# EAGLE board teensyMotors02_upSwitch_LED (EAGLE 9.1.3)
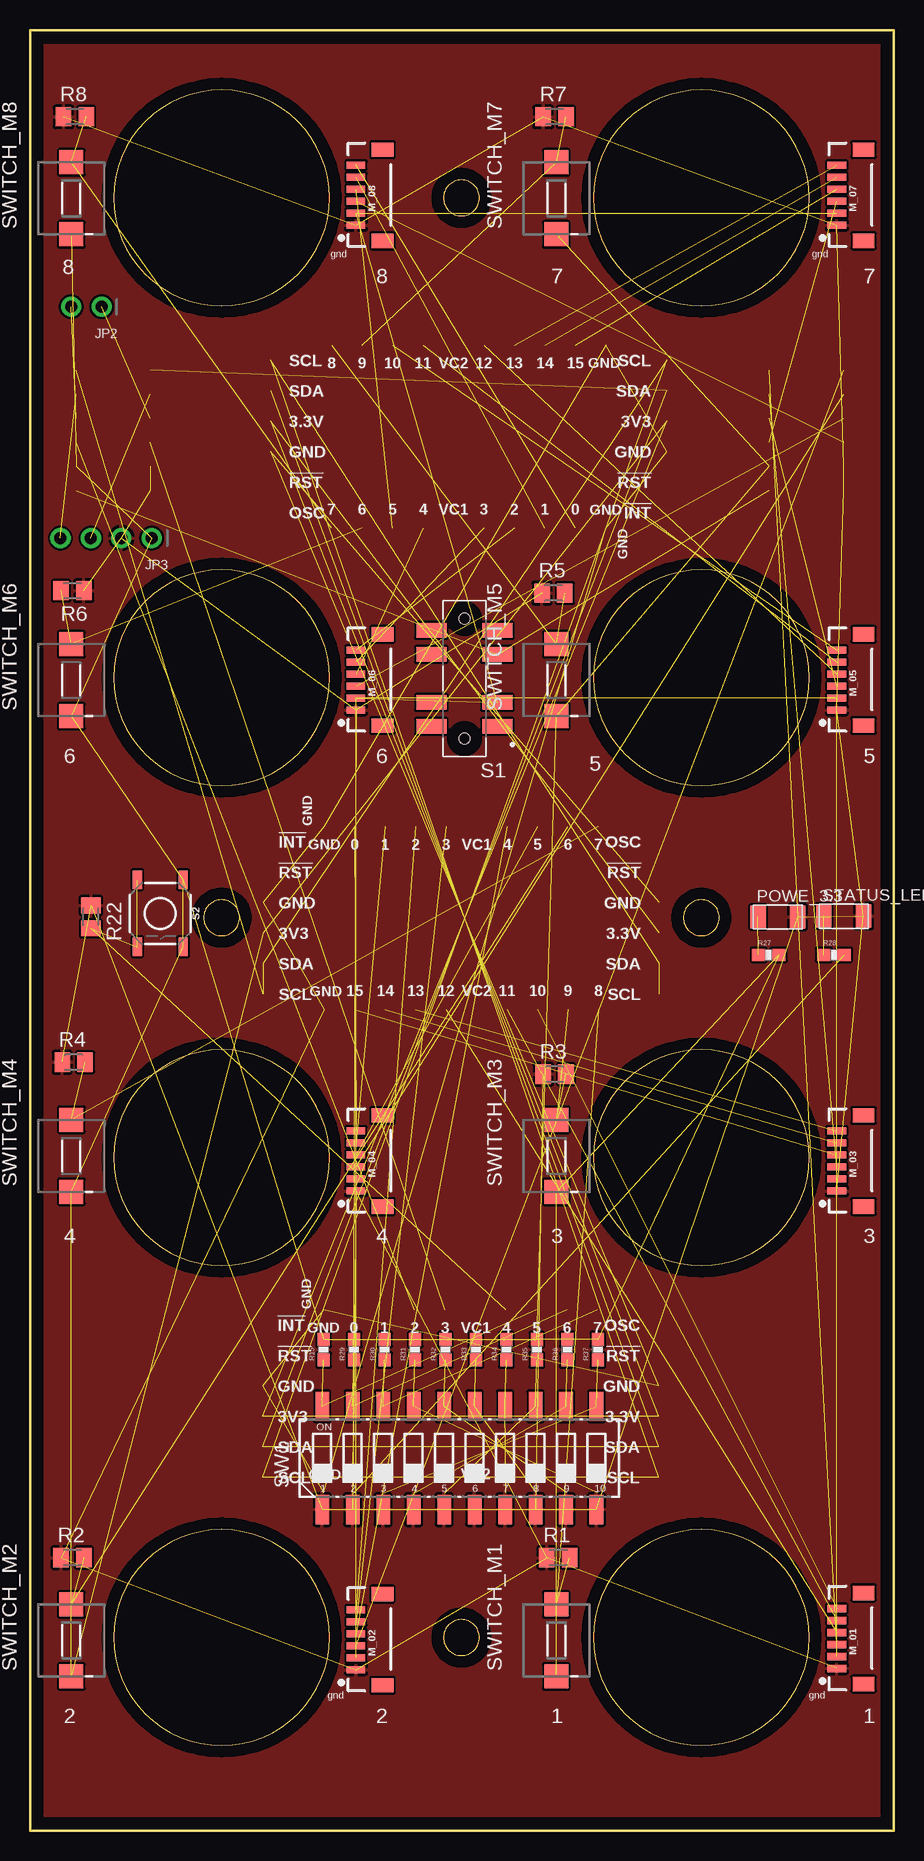
[diagram p0: board, top side]
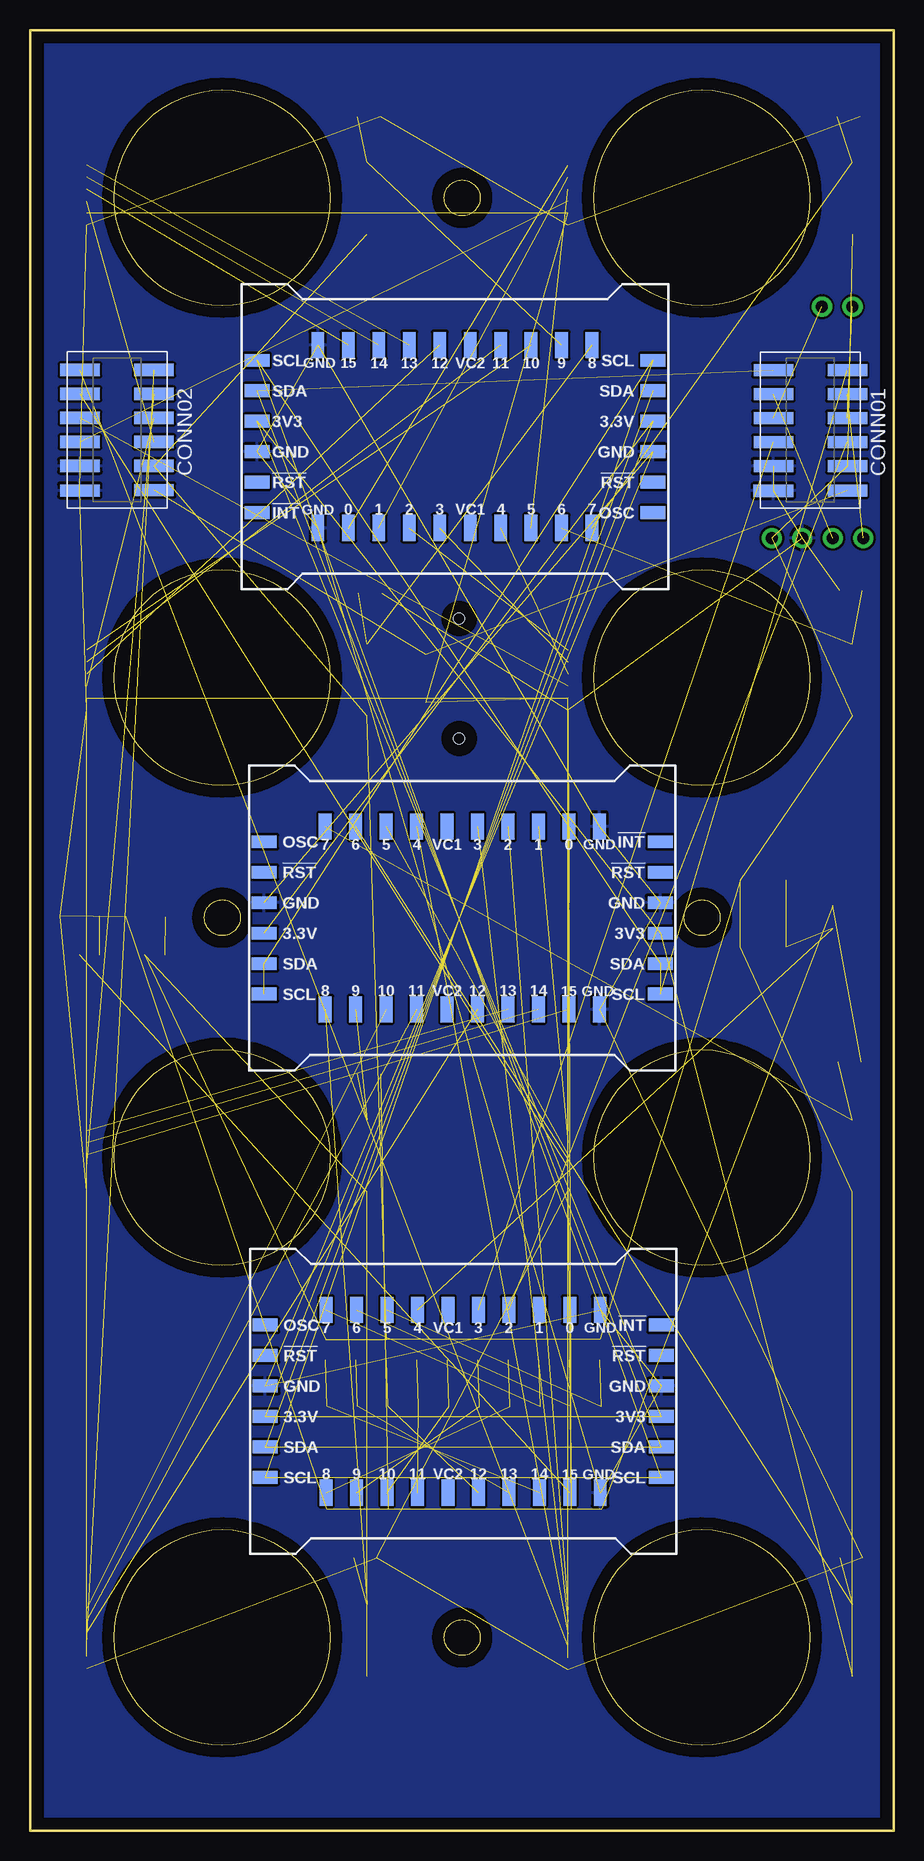
[diagram p1: board, bottom side, seen from below]

Size 72.01 x 150.09 mm. Coordinates in mm from the lower left corner, seen from the top.
Outline: 35.97,14.59 arc180 35.97,17.59 arc180 35.97,14.59
Outline: 15.97,74.59 arc180 15.97,77.59 arc180 15.97,74.59
Outline: 35.97,134.59 arc180 35.97,137.59 arc180 35.97,134.59
Outline: 55.97,74.59 arc180 55.97,77.59 arc180 55.97,74.59
Outline: 15.97,127.09 arc180 15.97,145.09 arc180 15.97,127.09
Outline: 55.97,127.09 arc180 55.97,145.09 arc180 55.97,127.09
Outline: 55.97,87.09 arc180 55.97,105.09 arc180 55.97,87.09
Outline: 55.97,47.09 arc180 55.97,65.09 arc180 55.97,47.09
Outline: 55.97,7.09 arc180 55.97,25.09 arc180 55.97,7.09
Outline: 15.97,7.09 arc180 15.97,25.09 arc180 15.97,7.09
Outline: 15.97,47.09 arc180 15.97,65.09 arc180 15.97,47.09
Outline: 15.97,87.09 arc180 15.97,105.09 arc180 15.97,87.09
Outline: 72.01,150.09 72.01,0 0,0 0,150.09 72.01,150.09
Copper layers (1*16): Top 0.035mm / dielectric 1.5mm / Bottom 0.035mm
Design rules "default": minimum track width 6mil, minimum drill 0.35mm, track to track 6mil, track to pad 6mil, pad to pad 6mil, via to via 6mil, smd to smd 6mil, copper to edge 40mil, drill to drill 6mil, minimum pad ring 10mil, minimum via ring 8mil, stop-mask expansion 4mil, vias tented up to drill 0mil, thermal gap 10mil
Net classes: 0 default: width 0.2 mm, clearance 0.2 mm; 1 gnd: width 0.2 mm, clearance 0.2 mm; 4 5v: width 0.35 mm, clearance 0.2 mm

## Footprints (pad centres in the part's own frame; a part is rotated, then mirrored left to right if it is on the bottom)
TMMH-105-12 = smd 1.016 x 3.302: 1 -5.27,-3.086; 2 -5.27,3.086; 3 -3.27,-3.086; 4 -3.27,3.086; 5 -1.27,-3.086; 6 -1.27,3.086; 7 0.73,-3.086; 8 0.73,3.086; 9 2.73,-3.086; 10 2.73,3.086; 11 4.781,-3.099; 12 4.755,3.086
1X02_ROUND = drill 1 pad 1.676: 1 -1.27,0; 2 1.27,0
1X04_ROUND = drill 1 pad 1.676: 1 -3.81,0; 2 -1.27,0; 3 1.27,0; 4 3.81,0
1X06-1MM = smd 0.6 x 1.55: 1 -2.54,1.27; 2 -1.54,1.27; 3 -0.54,1.27; 4 0.46,1.27; 5 1.46,1.27; 6 2.46,1.27 | smd 1.2 x 1.8: P$1 -3.84,-0.955; P$2 3.76,-0.955
LED1206FAB = smd 1.27 x 1.905: 1 -1.651,0; 2 1.651,0
M0805 = smd 1.3 x 1.6: 1 -0.95,0; 2 0.95,0
0603-RES = smd 1.1 x 1: 1 -0.85,0; 2 0.85,0
SW_JS207011SCQNR = smd 2.5 x 1.2: 1 -2.75,4; 2 -2.75,2; 3 -2.75,-2; 4 -2.75,-4; 5 2.75,4; 6 2.75,2; 7 2.75,-2; 8 2.75,-4 | hole 0.9: 0,5; 0,-5
TACTILE_SWITCH_SMD_5.2MM = smd 1.524 x 0.762: 1 -2.794,1.905; 2 2.794,1.905; 3 -2.794,-1.905; 4 2.794,-1.905
CTS-219-10 = smd 1.13 x 2.44: 1 -11.43,-4.3; 2 -8.89,-4.3; 3 -6.35,-4.3; 4 -3.81,-4.3; 5 -1.27,-4.3; 6 1.27,-4.3; 7 3.81,-4.3; 8 6.35,-4.3; 9 8.89,-4.3; 10 11.43,-4.3; 11 11.43,4.3; 12 8.89,4.3; 13 6.35,4.3; 14 3.81,4.3; 15 1.27,4.3; 16 -1.27,4.3; 17 -3.81,4.3; 18 -6.35,4.3; 19 -8.89,4.3; 20 -11.43,4.3
DTSM-3 = smd 2 x 2: 1 -3,0; 2 3,0
SX1509 = smd 2.184 x 1.067: 0 -7.62,7.62; 1 -7.62,5.08; 2 -7.62,2.54; 3 -7.62,0; 4 -7.62,-5.08; 5 -7.62,-7.62; 6 -7.62,-10.16; 7 -7.62,-12.7; 8 7.62,-12.7; 9 7.62,-10.16; 10 7.62,-7.62; 11 7.62,-5.08; 12 7.62,0; 13 7.62,2.54; 14 7.62,5.08; 15 7.62,7.62; GND_1 7.62,10.16; GND_2 -7.62,10.16; VC2 7.62,-2.54; VCC1 -7.62,-2.54 | smd 1.067 x 2.083: 3.3V 1.27,-17.78; 3.3V_1 1.27,15.24; GND -1.27,-17.78; GND_3 -1.27,15.24; INT -6.35,15.24; OSC -6.35,-17.78; RST -3.81,-17.78; RST_1 -3.81,15.24; SCL 6.35,-17.78; SCL_2 6.35,15.24; SDA 3.81,-17.78; SDA_2 3.81,15.24

## Placement (x,y rotation side)
CONN01  TMMH-105-12  [TMMH-105-12]  6.93,116.46 270 bottom
CONN02  TMMH-105-12  [TMMH-105-12]  64.75,116.48 270 bottom
JP2  [1X02_ROUND]  4.7,127.03 180 top
JP3  [1X04_ROUND]  6.35,107.75 180 top
M_01  [1X06-1MM]  68.54,16.05 90 top
M_02  [1X06-1MM]  28.44,15.95 90 top
M_03  [1X06-1MM]  68.54,55.85 90 top
M_04  [1X06-1MM]  28.44,55.85 90 top
M_05  [1X06-1MM]  68.54,95.95 90 top
M_06  [1X06-1MM]  28.44,95.95 90 top
M_07  [1X06-1MM]  68.54,136.35 90 top
M_08  [1X06-1MM]  28.44,136.35 90 top
POWE_3.3  LEDFAB1206  [LED1206FAB]  62.36,76.15 0 top
R1  10k  [M0805]  44.04,22.75 0 top
R2  10k  [M0805]  3.54,22.75 0 top
R3  10k  [M0805]  43.74,63.05 0 top
R4  10K  [M0805]  3.64,64.05 0 top
R5  10k  [M0805]  43.64,103.15 0 top
R6  10k  [M0805]  3.54,103.35 180 top
R7  10k  [M0805]  43.74,142.85 0 top
R8  10k  [M0805]  3.74,142.85 0 top
R15  10K  [0603-RES]  24.49,40.08 90 top
R22  10K  [M0805]  5.09,76.16 270 top
R27  500  [0603-RES]  61.59,73 0 top
R28  500  [0603-RES]  67.03,73 0 top
R29  10K  [0603-RES]  27.03,40.08 90 top
R30  10K  [0603-RES]  29.57,40.08 90 top
R31  10K  [0603-RES]  32.11,40.08 90 top
R32  10K  [0603-RES]  34.65,40.08 90 top
R33  10K  [0603-RES]  37.19,40.08 90 top
R34  10K  [0603-RES]  39.73,40.08 90 top
R35  10K  [0603-RES]  42.27,40.08 90 top
R36  10K  [0603-RES]  44.81,40.08 90 top
R37  10K  [0603-RES]  47.35,40.08 90 top
S1  JS207011SCQNR  [SW_JS207011SCQNR]  36.22,96.04 180 top
S2  [TACTILE_SWITCH_SMD_5.2MM]  10.86,76.46 270 top
STATUS_LED  LEDFAB1206  [LED1206FAB]  67.84,76.23 0 top
SW1  219-10  [CTS-219-10]  35.8,31.06 0 top
SWITCH_M1  DTSM-3  [DTSM-3]  43.89,15.85 90 top
SWITCH_M2  DTSM-3  [DTSM-3]  3.44,15.85 90 top
SWITCH_M3  DTSM-3  [DTSM-3]  43.89,56.25 90 top
SWITCH_M4  DTSM-3  [DTSM-3]  3.44,56.25 90 top
SWITCH_M5  DTSM-3  [DTSM-3]  43.89,95.9 90 top
SWITCH_M6  DTSM-3  [DTSM-3]  3.44,95.9 90 top
SWITCH_M7  DTSM-3  [DTSM-3]  43.89,136.05 90 top
SWITCH_M8  DTSM-3  [DTSM-3]  3.44,136.05 90 top
U$1  SX1509  [SX1509]  34.7,76.07 270 bottom
U$2  SX1509  [SX1509]  37.85,116.2 90 bottom
U$3  SX1509  [SX1509]  34.62,35.79 270 bottom

## Library data of the parts
CONN01 CONN02 = TMMH-105-XX-XX-DV
JP2 JP3 = microbuilder
M_01-M_08 = SparkFun-Connectors; PROD_ID: CONN-08249; SF_ID: GPS-00579
POWE_3.3 STATUS_LED = fab
R1-R8 R22 = resistor
R15 R27-R37 = SparkFun-Resistors; PROD_ID: RES-00824
S1 = JS207011SCQNR; AVAILABILITY: Unavailable; DESCRIPTION: Slide Switch DP3T Surface Mount; MF: C&K; MP: JS207011SCQNR; PACKAGE: None; PRICE: None
S2 = SparkFun-Switches; PROD_ID: SWCH-08247; SF_SKU: COM-08720
SW1 = switch-dil; MF: SLI (CML/IDI); MPN: 219-10PK; OC_FARNELL: unknown; OC_NEWARK: 19M0224
SWITCH_M1-SWITCH_M8 = switch-tact
U$1-U$3 = SX1509_s

## Nets
0_SX1: M_04.6 U$1.0
0_SX2: M_08.6 U$2.0
0_SX3: U$3.0
1_SX1: M_04.5 U$1.1
1_SX2: M_08.5 U$2.1
1_SX3: U$3.1
2_SX1: M_02.6 U$1.2
2_SX2: M_06.6 U$2.2
2_SX3: CONN01.8 U$3.2
3.3V: CONN01.10 CONN02.10 JP3.1 R15.2 R27.2 R29.2 R30.2 R31.2 R32.2 R33.2 R34.2 R35.2 R36.2 R37.2 S2.1 S2.2 SWITCH_M1.1 SWITCH_M2.1 SWITCH_M3.1 SWITCH_M4.1 SWITCH_M5.1 SWITCH_M6.1 SWITCH_M7.1 SWITCH_M8.1 U$1.3.3V U$1.3.3V_1 U$2.3.3V U$2.3.3V_1 U$3.3.3V U$3.3.3V_1
3_SX1: M_02.5 U$1.3
3_SX2: M_06.5 U$2.3
3_SX3: CONN01.7 U$3.3
4_SX1: M_02.4 U$1.4
4_SX2: M_06.4 U$2.4
4_SX3: R22.2 S2.3 S2.4 U$3.4
5_SX1: M_04.4 U$1.5
5_SX2: M_08.4 U$2.5
5_SX3: R15.1 SW1.20 U$3.5
6_SX1: R2.2 SWITCH_M2.2 U$1.6
6_SX2: R6.2 SWITCH_M6.2 U$2.6
6_SX3: R29.1 SW1.19 U$3.6
7_SX1: R4.2 SWITCH_M4.2 U$1.7
7_SX2: R8.2 SWITCH_M8.2 U$2.7
7_SX3: R30.1 SW1.18 U$3.7
8_SX1: R1.2 SWITCH_M1.2 U$1.8
8_SX2: R5.2 SWITCH_M5.2 U$2.8
8_SX3: R31.1 SW1.17 U$3.8
9_SX1: R3.2 SWITCH_M3.2 U$1.9
9_SX2: R7.2 SWITCH_M7.2 U$2.9
9_SX3: R32.1 SW1.16 U$3.9
10_SX1: M_01.6 U$1.10
10_SX2: M_05.6 U$2.10
10_SX3: R33.1 SW1.15 U$3.10
11_SX1: M_01.5 U$1.11
11_SX2: M_05.5 U$2.11
11_SX3: R34.1 SW1.14 U$3.11
12_SX1: M_01.4 U$1.12
12_SX2: M_05.4 U$2.12
12_SX3: R35.1 SW1.13 U$3.12
13_SX1: M_03.6 U$1.13
13_SX2: M_07.6 U$2.13
13_SX3: R36.1 SW1.12 U$3.13
14_SX1: M_03.5 U$1.14
14_SX2: M_07.5 U$2.14
14_SX3: R37.1 SW1.11 U$3.14
15_SX1: M_03.4 U$1.15
15_SX2: M_07.4 U$2.15
15_SX3: R28.2 U$3.15
CAN_RX2: CONN01.4 JP3.4
CAN_TX2: CONN01.3 JP3.3
GND_MCU: CONN01.9 CONN01.11 CONN02.9 CONN02.11 JP3.2 M_01.1 M_02.1 M_03.1 M_04.1 M_05.1 M_06.1 M_07.1 M_08.1 POWE_3.3.2 R1.1 R2.1 R3.1 R4.1 R5.1 R6.1 R7.1 R8.1 R22.1 STATUS_LED.2 SW1.1 SW1.2 SW1.3 SW1.4 SW1.5 SW1.6 SW1.7 SW1.8 SW1.9 SW1.10 U$1.GND U$1.GND_1 U$1.GND_2 U$1.GND_3 U$2.GND U$2.GND_1 U$2.GND_2 U$2.GND_3 U$3.GND U$3.GND_1 U$3.GND_2 U$3.GND_3
N$4: U$1.INT
N$13: R28.1 STATUS_LED.1
N$25: U$3.INT
N$193: POWE_3.3.1 R27.1
NEOPIXEL_01: CONN02.2 M_01.3
NEOPIXEL_02: CONN02.1 M_02.3
NEOPIXEL_03: CONN02.4 M_03.3
NEOPIXEL_04: CONN02.3 M_04.3
NEOPIXEL_05: CONN02.6 M_05.3
NEOPIXEL_06: CONN02.5 M_06.3
NEOPIXEL_07: CONN02.8 M_07.3
NEOPIXEL_08: CONN02.7 M_08.3
RX7: CONN01.6 JP2.2
SCL_00: CONN01.2 U$1.SCL U$1.SCL_2 U$1.SDA U$1.SDA_2 U$2.SCL U$2.SCL_2 U$3.SCL U$3.SCL_2
SDA_00: CONN01.1 U$2.SDA U$2.SDA_2 U$3.SDA U$3.SDA_2
TX7: CONN01.5 JP2.1
VCC_5V [5v]: M_01.2 M_02.2 M_03.2 M_04.2 M_05.2 M_06.2 M_07.2 M_08.2 S1.2
VCC_5V_IN [5v]: CONN01.12 CONN02.12 S1.3

## Tracks (layer width: path | path; a pad name or v marks a point on that pad's centre or on a via)
0_SX1  (1 unrouted)
0_SX2  (1 unrouted)
1_SX1  (1 unrouted)
1_SX2  (1 unrouted)
2_SX1  (1 unrouted)
2_SX2  (1 unrouted)
2_SX3  (1 unrouted)
3.3V  (29 unrouted)
3_SX1  (1 unrouted)
3_SX2  (1 unrouted)
3_SX3  (1 unrouted)
4_SX1  (1 unrouted)
4_SX2  (1 unrouted)
4_SX3  (3 unrouted)
5_SX1  (1 unrouted)
5_SX2  (1 unrouted)
5_SX3  (2 unrouted)
6_SX1  (2 unrouted)
6_SX2  (2 unrouted)
6_SX3  (2 unrouted)
7_SX1  (2 unrouted)
7_SX2  (2 unrouted)
7_SX3  (2 unrouted)
8_SX1  (2 unrouted)
8_SX2  (2 unrouted)
8_SX3  (2 unrouted)
9_SX1  (2 unrouted)
9_SX2  (2 unrouted)
9_SX3  (2 unrouted)
10_SX1  (1 unrouted)
10_SX2  (1 unrouted)
10_SX3  (2 unrouted)
11_SX1  (1 unrouted)
11_SX2  (1 unrouted)
11_SX3  (2 unrouted)
12_SX1  (1 unrouted)
12_SX2  (1 unrouted)
12_SX3  (2 unrouted)
13_SX1  (1 unrouted)
13_SX2  (1 unrouted)
13_SX3  (2 unrouted)
14_SX1  (1 unrouted)
14_SX2  (1 unrouted)
14_SX3  (2 unrouted)
15_SX1  (1 unrouted)
15_SX2  (1 unrouted)
15_SX3  (1 unrouted)
CAN_RX2  (1 unrouted)
CAN_TX2  (1 unrouted)
GND_MCU  (45 unrouted)
  pour Top: -12.09,153.11 83.39,153.11 83.39,-12.5 -12.09,-12.5
  pour Bottom: -11.56,157.91 83.16,157.91 83.16,-9.7 -11.56,-9.7
N$13  (1 unrouted)
N$193  (1 unrouted)
NEOPIXEL_01  (1 unrouted)
NEOPIXEL_02  (1 unrouted)
NEOPIXEL_03  (1 unrouted)
NEOPIXEL_04  (1 unrouted)
NEOPIXEL_05  (1 unrouted)
NEOPIXEL_06  (1 unrouted)
NEOPIXEL_07  (1 unrouted)
NEOPIXEL_08  (1 unrouted)
RX7  (1 unrouted)
SCL_00  (8 unrouted)
SDA_00  (4 unrouted)
TX7  (1 unrouted)
VCC_5V  (8 unrouted)
VCC_5V_IN  (2 unrouted)

## Text on the board
tPlace: gnd | gnd | 8 | 8 | 7 | 7 | 6 | 6 | 5 | 5 | 4 | 4 | 3 | 3 | gnd | gnd | 2 | 2 | 1 | 1